# Altium PCB H21R4.PcbDoc
Units mil, origin at the board's own origin, x right, y up, seen from the top; angles counter-clockwise.
Board outline 1363.78 x 1181.1 mil, 2 copper layers (Top Layer, Bottom Layer); 61 components, 50 nets, 209 pads, 10 vias.
Unrouted connection lines stored in the file: 51.
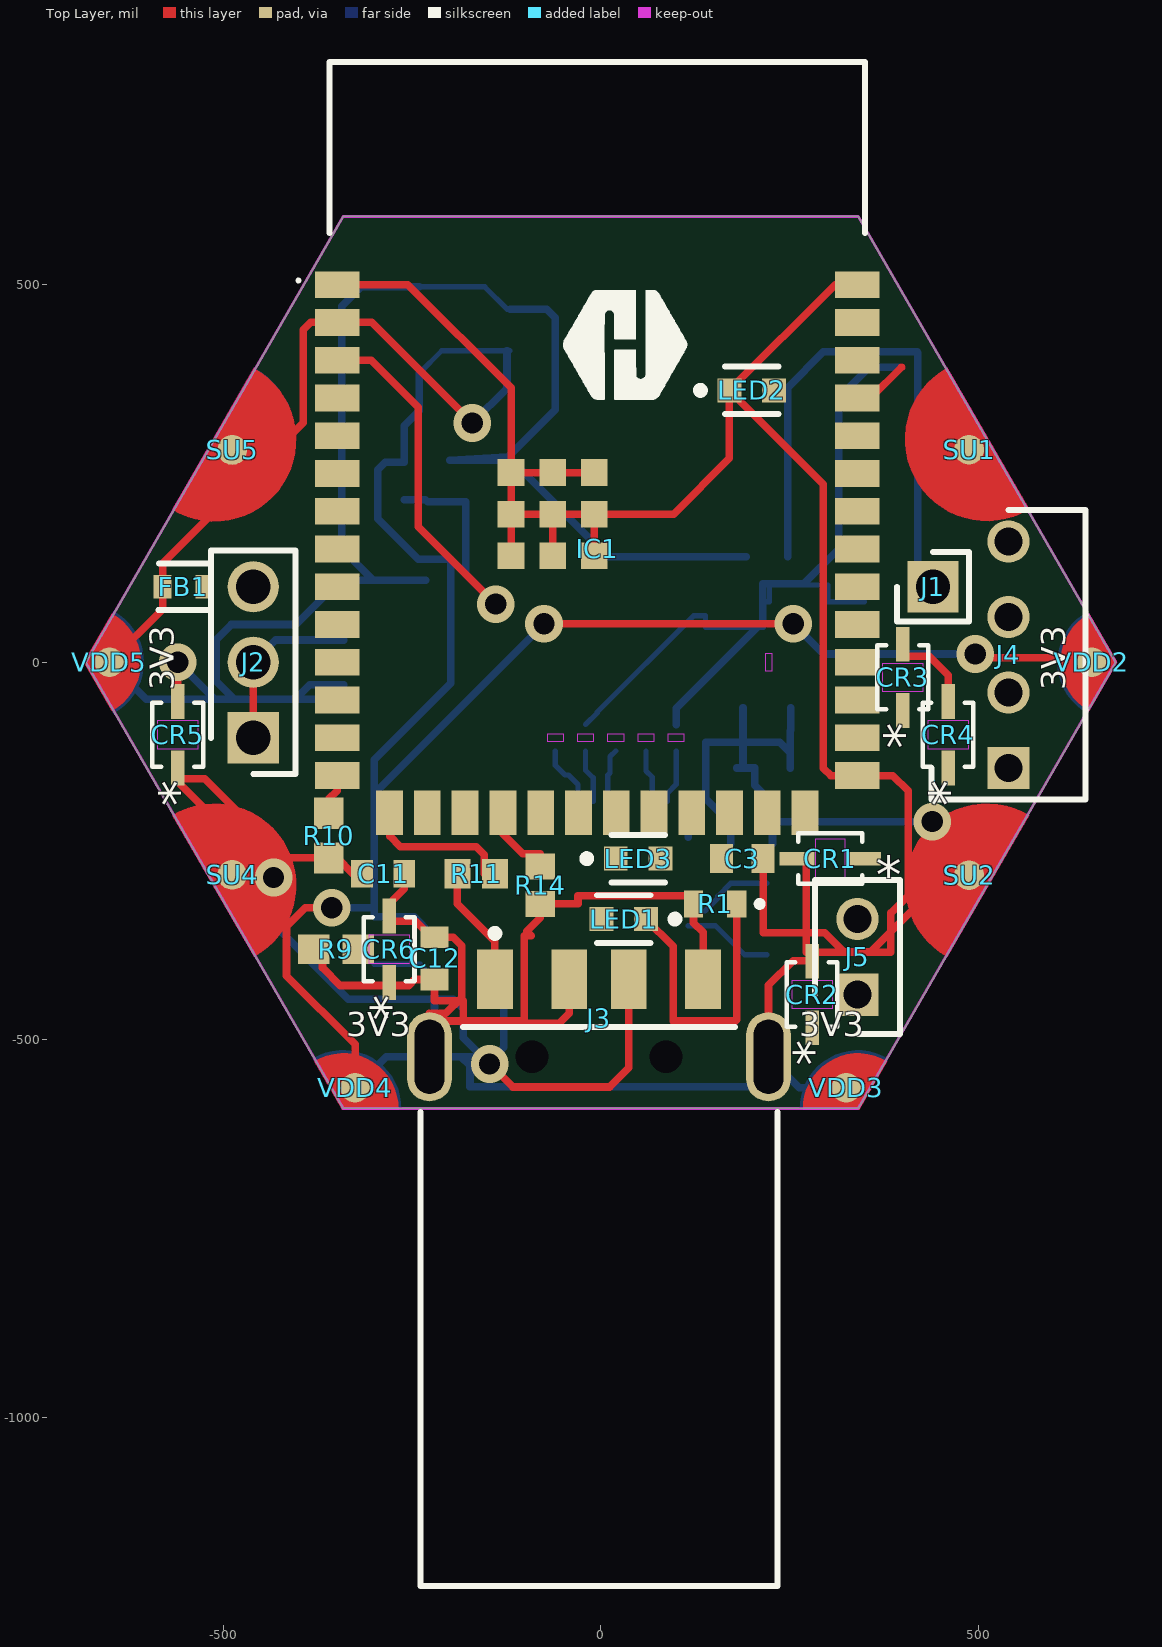
[diagram p0: Top Layer view]
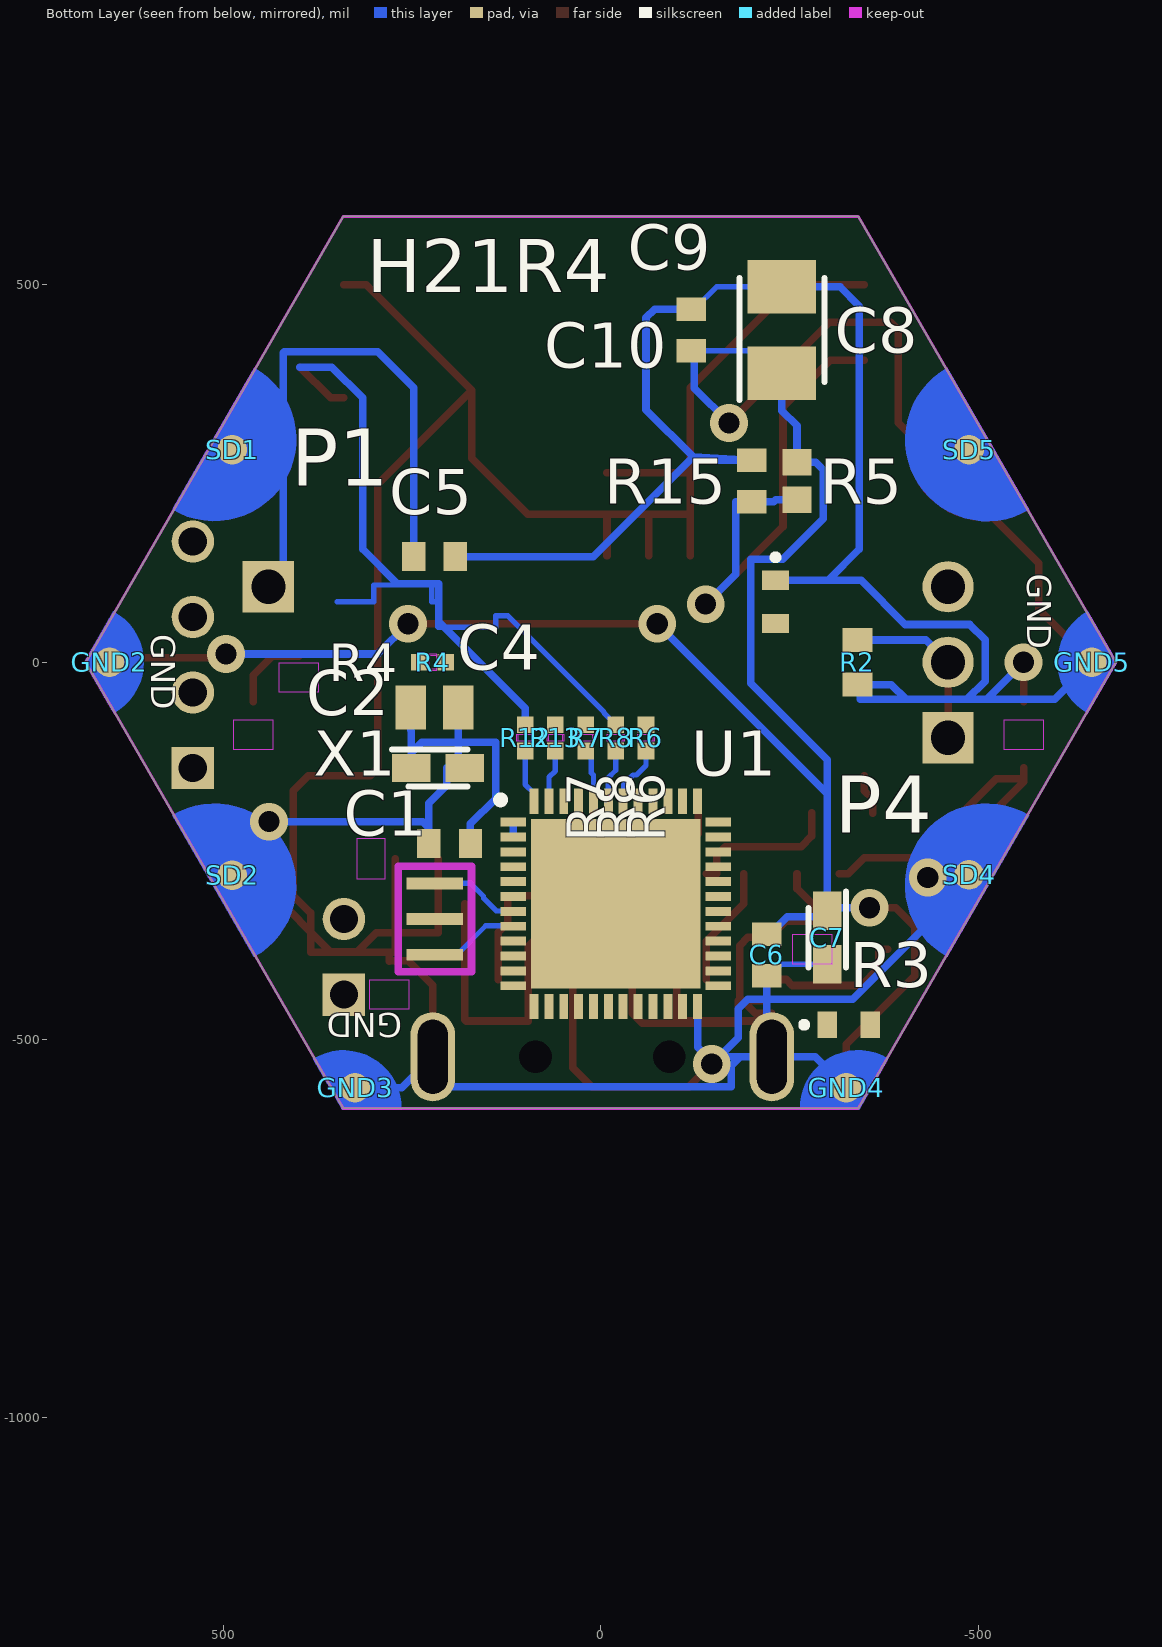
[diagram p1: Bottom Layer view, seen from below]

## Layer stack, top to bottom
Top Solder: solder mask 0.4, Solder Resist, Dk 3.5
Top Layer: signal copper 1.4
Dielectric 1: dielectric 12.6, FR-4, Dk 4.8
Bottom Layer: signal copper 1.4
Bottom Solder: solder mask 0.4, Solder Resist, Dk 3.5

## Board outline
-340.94,-590.55 340.94,-590.55 681.89,0 340.94,590.55 -340.94,590.55 -681.89,0

## Design rules (kind name [scope] priority, off if disabled: settings)
Clearance [All] p1: gap=10 ignorepadtopadclearanceinfootprint=FALSE
PolygonConnect [All] p1: connectstyle=Relief reliefconductorwidth=10 reliefentries=4 polygonreliefangle="90 Angle" airgapwidth=10
RoutingVias [All] p1: holewidth=28 width=50 viastyle="Through Hole" minholewidth=28 minwidth=50 maxholewidth=28 maxwidth=50
SolderMaskExpansion [All] p1: expansion=4 istentingtop=FALSE
SupplyNets "Schematic Supply Nets_3" [InNet('GND')] p1: voltage=0.000
SupplyNets "Schematic Supply Nets_2" [InNet('VDDA')] p2: voltage=0.000
SupplyNets "Schematic Supply Nets_1" [InNet('VSSA')] p3: voltage=0.000
SupplyNets "Schematic Supply Nets" [InNet('VDD')] p4: voltage=0.000
Width [All] p1: maxlimit=10 minlimit=7 preferedwidth=10
30 further rules are at their usual default settings.

## Classes and differential pairs
component class H21R4_Frontend: C8 C9 C10 C11 C12 CR1 CR2 CR3 CR4 CR5 CR6 D+ D- IC1 J3 J4 J5 LED3 R5 R6 R7 R8 R9 R10 R11 R12 R13 R14 R15 RX0 TCK TDI TDO TMS TX0
component class H21R4_Backend: C1 C2 C3 C4 C5 C6 C7 D? FB1 GND2 GND3 GND4 GND5 J1 J2 LED1 LED2 R1 R2 R3 R4 SD1 SD2 SD4 SD5 SU1 SU2 SU4 SU5 U1 VDD2 VDD3 VDD4 VDD5 X1

## Components (designator, comment, footprint, x,y, rotation, side; value= is the part's Value field where it differs from the comment)
C1 "C0603C104K8RAC7867" CAPC1608X87N 200,-240 r180 bottom value=100nF
C2 "10TPU4R7MSI" CAPPM2012X100N 215.43,-140 r180 bottom value=4.7µF
C3 "C0603C104K8RAC7867" CAPC1608X87N 187.56,-260 r180 top value=100nF
C4 "CC0805KKX7R7BB105" CAPC2012X145N 220,-60 r180 bottom value=1µF
C5 "C0603C104K8RAC7867" CAPC1608X87N 220,140 r180 bottom value=0.1µF
C6 "C0603C104K8RAC7867" CAPC1608X87N -220,-387.56 r90 bottom value=100nF
C7 "10TPU4R7MSI" CAPPM2012X100N -300,-364.57 r270 bottom value=4.7µF
C8 "TPSB106K016R0500" CAPPM3528X210N -240,440 r90 bottom value=10µF
C9 "C0603C104K8RAC7867" CAPC1608X87N -120,440 r90 bottom value=0.1µF
C10 "C0603C104K8RAC7867" CAPC1608X87N -200,240 r90 bottom value=0.1µF
C11 "CL10C470JB8NNNC" CAPC1608X90N -287.95,-280 r0 top value=47pF
C12 "CL10C470JB8NNNC" CAPC1608X90N -220,-392.05 r90 top value=47pF
CR1 "CDSOD323-T03SC" SOD-323_BRN 304,-260 r180 top
CR2 "CDSOD323-T03SC" SOD-323_BRN 280,-440 r90 top
CR3 "CDSOD323-T03SC" SOD-323_BRN 400,-20 r90 top
CR4 "CDSOD323-T03SC" SOD-323_BRN 460,-96 r90 top
CR5 "CDSOD323-T03SC" SOD-323_BRN -560,-96 r90 top
CR6 "CDSOD323-T03SC" SOD-323_BRN -280,-380 r90 top
FB1 "MMZ1608Y300B" FP-MMZ1608-0_8-MFG -552.44,100 r0 top
GND2 "HEXABIT_UART_PORT" HEXABIT_POWER_PORT_D 650.39,0 r300 top
GND3 "HEXABIT_UART_PORT" HEXABIT_POWER_PORT_D 325.2,-563.39 r240 top
GND4 "HEXABIT_UART_PORT" HEXABIT_POWER_PORT_D -325.2,-563.39 r180 top
GND5 "HEXABIT_UART_PORT" HEXABIT_POWER_PORT_D -650.39,0 r120 top
IC1 "ESP32-S3-WROOM-1-N8" ESP32S3WROOM1N8R2 -4.49,292.91 r0 top
J1 "5-146280-1" HDRV1W67P0X254_1X1_213X234X821P 440,100 r0 top
J2 "5-146281-3" HDRV3W96P0X254_1X3_721X234X869P -460,-100 r90 top
J3 "480-37-1000" MOLX-480-37-1000_V -2.2,-471.18 r0 top
J4 "5-146280-4" HDRV4W77P254_4X1_467X488X821P 540,-140 r0 top
J5 "5-146280-2" HDRV2W77P0X254_1X2_467X234X872P 340,-440 r90 top
LED1 "VLMS1300-GS08" FP-6_541-5092_01-4-MFG 30.47,-340 r180 top
LED2 "VLMS1300-GS08" FP-6_541-5092_01-4-MFG 200,360 r0 top
LED3 "VLMS1300-GS08" FP-6_541-5092_01-4-MFG 49.53,-260 r0 top
R1 "ERJ-3GEYJ271V" ERJ3EKF1000V 151.46,-320 r180 top value=270Ω
R2 "Resistor 10k +/-1% 0603 100 mW" RESC1608X55X25ML10T15 -340,0 r270 bottom value=10kΩ
R3 "ERJ-3GEYJ271V" ERJ3EKF1000V -328.54,-480 r180 bottom value=270Ω
R4 "AC0402JR-070RL" YAG_AC0402_YAG 222.5,0 r180 bottom value=0R
R5 "RMCF0603JT10K0" CAPC1508X06N -260,240 r270 bottom value=10k
R6 "AC0402JR-070RL" YAG_AC0402_YAG -60,-100 r90 bottom value=0R
R7 "AC0402JR-070RL" YAG_AC0402_YAG 20,-100 r90 bottom value=0R
R8 "AC0402JR-070RL" YAG_AC0402_YAG -20,-100 r90 bottom value=0R
R9 "ERJ-3GEYJ270V" CAPC1608X06N -350.47,-380 r0 top value=27R
R10 "ERJ-3GEYJ270V" CAPC1608X06N -360,-229.53 r90 top value=27R
R11 "RMCF0603JT10K0" CAPC1508X06N -164.8,-280 r0 top value=10k
R12 "AC0402JR-070RL" YAG_AC0402_YAG 100,-100 r270 bottom value=0R
R13 "AC0402JR-070RL" YAG_AC0402_YAG 60,-100 r270 bottom value=0R
R14 "RMCF0603JT10K0" CAPC1508X06N -80,-295.2 r90 top value=10k
R15 "ERJ-3GEYJ271V" ERJ3EKF1000V -231.46,80 r270 bottom value=270Ω
SD1 "HEXABIT_UART_PORT" HEXABIT_UART_PORT_D 487.8,281.5 r0 top
SD2 "HEXABIT_UART_PORT" HEXABIT_UART_PORT_D 487.8,-281.89 r300 top
SD4 "HEXABIT_UART_PORT" HEXABIT_UART_PORT_D -487.8,-281.5 r180 top
SD5 "HEXABIT_UART_PORT" HEXABIT_UART_PORT_D -487.8,281.5 r120 top
SU1 "HEXABIT_UART_PORT" HEXABIT_UART_PORT_U 487.8,281.5 r0 top
SU2 "HEXABIT_UART_PORT" HEXABIT_UART_PORT_U 487.8,-281.89 r300 top
SU4 "HEXABIT_UART_PORT" HEXABIT_UART_PORT_U -487.8,-281.5 r180 top
SU5 "HEXABIT_UART_PORT" HEXABIT_UART_PORT_U -487.8,281.11 r120 top
U1 "STM32G0B1CEU6" QFN50P700X700X65-49N-D -20,-320 r180 bottom
VDD2 "HEXABIT_UART_PORT" HEXABIT_POWER_PORT_U 650.39,0 r0 top
VDD3 "HEXABIT_UART_PORT" HEXABIT_POWER_PORT_U 325.2,-563.39 r300 top
VDD4 "HEXABIT_UART_PORT" HEXABIT_POWER_PORT_U -325.2,-563.39 r240 top
VDD5 "HEXABIT_UART_PORT" HEXABIT_POWER_PORT_U -650.39,0 r180 top
X1 "CSTCE8M00G52Z-R0" XTALL_CSTCE8M00G52 220,-340 r180 bottom value=10pF

## Footprints (in the part's own frame and the unit in brackets; to place one, negate y for a bottom-side part, rotate by r counter-clockwise, add the part's x,y. Pads: shape width x height; smd on the part's side, far side on the other; paste and mask are expansions set on the pad)
CAPC1508X06N [mm] "Chip Capacitor, 2-Leads, Body 1.55x0.80mm, IPC Medium Density"
  rect 0.88x0.98 smd: 1(-0.63,0) 2(0.63,0)
  body extent -0.85,-0.48 0.85,0.47, height 0.6
CAPC1608X06N [mm] "Chip Capacitor, 2-Leads, Body 1.60x0.80mm, IPC Medium Density"
  rect 1.05x1 smd: 1(-0.75,0) 2(0.75,0)
  body extent -0.88,-0.48 0.87,0.47, height 0.55
CAPC1608X87N [mm]
  rect 0.78x0.98 smd: 1(-0.7,0) 2(0.7,0)
CAPC1608X90N [mm]
  rect 0.73x0.94 smd: 1(-0.71,0) 2(0.71,0)
  body extent -0.8,-0.4 0.8,0.4, height 0.9
CAPC2012X145N [mm]
  rect 1.02x1.47 smd: 1(-0.8,0) 2(0.8,0)
CAPPM2012X100N [mm]
  rect 1.3x0.95 smd: 1(-0.9,0) 2(0.9,0)
  silkscreen extent -1.55,-0.63 1,0.62
CAPPM3528X210N [mm]
  rect 1.8x2.3 smd: 1(-1.45,0) 2(1.45,0)
  silkscreen extent -2.35,-1.43 1.75,1.43, body extent -1.75,-1.43 1.75,1.43, height 2.1
ERJ3EKF1000V [mm]
  rect 0.65x0.9 smd: 1(-0.725,0) 2(0.725,0)
  silkscreen extent -1.6,-0.1 -1.4,0.1, body extent -0.8,-0.4 0.8,0.4, height 0.45
ESP32S3WROOM1N8R2 [mm]
  rect 1.5x0.9 smd: 1(-8.75,5.26) 2(-8.75,3.99) 3(-8.75,2.72) 4(-8.75,1.45) 5(-8.75,0.18) 6(-8.75,-1.09) 7(-8.75,-2.36) 8(-8.75,-3.63) 9(-8.75,-4.9) 10(-8.75,-6.17) 11(-8.75,-7.44) 12(-8.75,-8.71) 13(-8.75,-9.98) 14(-8.75,-11.25) 27(8.75,-11.25) 28(8.75,-9.98) 29(8.75,-8.71) 30(8.75,-7.44) 31(8.75,-6.17) 32(8.75,-4.9) 33(8.75,-3.63) 34(8.75,-2.36) 35(8.75,-1.09) 36(8.75,0.18) 37(8.75,1.45) 38(8.75,2.72) 39(8.75,3.99) 40(8.75,5.26)
  rect 0.9x1.5 smd: 15(-6.985,-12.5) 16(-5.715,-12.5) 17(-4.445,-12.5) 18(-3.175,-12.5) 19(-1.905,-12.5) 20(-0.635,-12.5) 21(0.635,-12.5) 22(1.905,-12.5) 23(3.175,-12.5) 24(4.445,-12.5) 25(5.715,-12.5) 26(6.985,-12.5)
  rect 0.9x0.9 smd: 41(-1.5,-2.46) 42(-1.5,-1.06) 43(-2.9,-1.06) 44(-2.9,-2.46) 45(-2.9,-3.86) 46(-1.5,-3.86) 47(-0.1,-3.86) 48(-0.1,-2.46) 49(-0.1,-1.06)
  silkscreen extent -10.1,5.35 9,12.75, body extent -9,-12.75 9,12.75, height 2.7
FP-6_541-5092_01-4-MFG [mm]
  rect 0.8x0.8 smd paste+0 mask+0: 1(-0.75,0) 2(0.75,0)
  silkscreen extent -1.85,-0.8 0.9,0.8, body extent -1.25,-0.6 1.25,0.6, height 0.25
FP-MMZ1608-0_8-MFG [mm]
  rect 0.6x0.8 smd paste+0 mask+0: 1(-0.7,0) 2(0.7,0)
  silkscreen extent -0.85,-0.79 0.92,0.77, body extent -1.1,-0.58 1.1,0.58, height 0.25
HDRV1W67P0X254_1X1_213X234X821P [mm]
  rect 1.725x1.725 hole 1.15: 1(0,0)
  silkscreen extent -1.21,-1.17 1.21,1.17, body extent -1.07,-1.17 1.07,1.17, height 8.12
HDRV2W77P0X254_1X2_467X234X872P [mm]
  rect 1.425x1.425 / inner round 1.425 / far side rect 1.425x1.425 hole 0.95: 1(0,0)
  round 1.425 hole 0.95: 2(2.54,0)
  silkscreen extent -1.32,-1.43 3.86,1.43
HDRV3W96P0X254_1X3_721X234X869P [mm]
  rect 1.725x1.725 hole 1.15: 1(0,0)
  round 1.725 hole 1.15: 2(2.54,0) 3(5.08,0)
  silkscreen extent -1.21,-1.43 6.29,1.43, body extent -1.07,-1.17 6.15,1.17, height 8.12
HDRV4W77P254_4X1_467X488X821P [mm]
  rect 1.425x1.425 / inner round 1.425 / far side rect 1.425x1.425 hole 0.95: 1(0,0)
  round 1.425 hole 0.95: 2(0,2.54) 3(0,5.08) 4(0,7.62)
  silkscreen extent -2.59,-1.06 2.59,8.68
HEXABIT_POWER_PORT_D [mm]
  rrect100% 1x1 smd far side paste+0: Pwr_D(0,0)
  Bottom Layer region: 1.418,-0.978 0.633,-1.25 -0.194,-1.171 -0.914,-0.754 -1.394,-0.076 -1.549,0.74 -1.549,0.74 0.429,0.74
HEXABIT_POWER_PORT_U [mm]
  rrect100% 1x1 smd paste+0: Pwr_U(0,0)
  Top Layer region: -0.081,-1.631 -0.68,-1.115 -1.01,-0.395 -1.01,0.395 -0.68,1.115 -0.081,1.631 -0.081,1.631 0.858,0
HEXABIT_UART_PORT_D [mm]
  rrect100% 1x1 smd far side paste+0: UART_D(0,0)
  Bottom Layer region: 2.018,-2.008 0.84,-2.391 -0.386,-2.219 -1.413,-1.526 -2.032,-0.453 -2.117,0.782 -1.653,1.93 -0.731,2.758 -0.731,2.758
HEXABIT_UART_PORT_U [mm]
  rrect100% 1x1 smd paste+0: UART_U(0,0)
  Top Layer region: 2.018,-2.008 0.84,-2.391 -0.386,-2.219 -1.413,-1.526 -2.032,-0.453 -2.117,0.782 -1.653,1.93 -0.731,2.758 -0.731,2.758
MOLX-480-37-1000_V [mm] "CONN, 4-Leads, Body 12x18.8mm"
  rect 1.2x2 smd: 1(-3.5,1.3) 2(-1,1.3) 3(1,1.3) 4(3.5,1.3)
  oval 1.5x3 hole 1 slot 2.5 at 90 deg: 5(-5.7,-1.3) 6(5.7,-1.3)
  round 0.5 hole 1.1 unplated: MH1(-2.25,-1.3) MH2(2.25,-1.3)
  silkscreen extent -6,-19.1 6,2.97, body extent -6.35,-19.08 6.35,2.2, height 3.07
QFN50P700X700X65-49N-D [mm]
  rect 0.85x0.3 smd mask+0: 1(-3.45,2.75) 2(-3.45,2.25) 3(-3.45,1.75) 4(-3.45,1.25) 5(-3.45,0.75) 6(-3.45,0.25) 7(-3.45,-0.25) 8(-3.45,-0.75) 9(-3.45,-1.25) 10(-3.45,-1.75) 11(-3.45,-2.25) 12(-3.45,-2.75) 25(3.45,-2.75) 26(3.45,-2.25) 27(3.45,-1.75) 28(3.45,-1.25) 29(3.45,-0.75) 30(3.45,-0.25) 31(3.45,0.25) 32(3.45,0.75) 33(3.45,1.25) 34(3.45,1.75) 35(3.45,2.25) 36(3.45,2.75)
  rect 0.3x0.85 smd mask+0: 13(-2.75,-3.45) 14(-2.25,-3.45) 15(-1.75,-3.45) 16(-1.25,-3.45) 17(-0.75,-3.45) 18(-0.25,-3.45) 19(0.25,-3.45) 20(0.75,-3.45) 21(1.25,-3.45) 22(1.75,-3.45) 23(2.25,-3.45) 24(2.75,-3.45) 37(2.75,3.45) 38(2.25,3.45) 39(1.75,3.45) 40(1.25,3.45) 41(0.75,3.45) 42(0.25,3.45) 43(-0.25,3.45) 44(-0.75,3.45) 45(-1.25,3.45) 46(-1.75,3.45) 47(-2.25,3.45) 48(-2.75,3.45)
  rect 5.7x5.7 smd mask+0: 49(0,0)
  silkscreen extent -4,3.38 -3.75,3.62, body extent -3.56,-3.56 3.56,3.56, height 0.61
RESC1608X55X25ML10T15 [mm] "Chip Resistor, 2-Leads, Body 1.70x0.90mm, IPC Low Density"
  rect 0.8x1 smd: 1(-0.75,0) 2(0.75,0)
  body extent -0.85,-0.45 0.85,0.45, height 0.55
SOD-323_BRN [mil]
  rect 46x18 smd paste+0 mask+0: 1(-44,0) 2(44,0)
  Keep-Out Layer region: -19,-26.5 -19,26.5 19,26.5 19,-26.5
  silkscreen extent -43,-33 42,34, body extent -53,-29 53,29, height 45
XTALL_CSTCE8M00G52 [mm]
  rect 1.9x0.4 smd: P$1(0,1.2) P$2(0,0) P$3(0,-1.2)
  Top Layer keep-out lines w0.254: 1.245,-1.778 1.245,1.778 -1.219,1.778 -1.219,-1.778 1.245,-1.778
  body extent -0.67,-1.6 0.64,1.6, height 0.8
YAG_AC0402_YAG [mil]
  rect 22x22 smd paste+0 mask+0: 1(-17.5,0) 2(17.5,0)
  Top Layer keep-out region: -4.5,-9 -4.5,9 4.5,9 4.5,-9
  Keep-Out Layer region: -4.5,-11 -4.5,11 4.5,11 4.5,-11
  body extent -21,-11 21,11, height 15

## Part data
C1 C3 C6: library part CMP-001-00141-1, "Multilayer Ceramic Capacitors MLCC - SMD/SMT .1UF     10V   10%        0603", Manufacturer_Name=KEMET, Mouser Part Number=N/A, Arrow Part Number=C0603C104K8RAC7867, Arrow Price/Stock=https://www.arrow.com/en/products/c0603c104k8rac7867/kemet-corporation?region=nac, Datasheet Link=https://labcenter.componentsearchengine.com/Datasheets/1/C0603C104K8RAC7867.pdf, Design Item ID=C0603C104K8RAC7867, Geometry.Height=0.87mm, Manufacturer_Part_Number=C0603C104K8RAC7867, Mouser Price/Stock=https://www.mouser.co.uk/ProductDetail/KEMET/C0603C104K8RAC7867?qs=DLNzJaHuXGcLxwK2qWBfDA%3D%3D, Source=C0603C104K8RAC7867.SchLib
C2 C7: library part CMP-001-00143-1, "Capacitor Tantalum TPU series 10V 4.7uF Panasonic 4.7uF 10 V dc Tantalum Capacitor Polymer Solid +/-20% tolerance POSCAP series", Manufacturer_Name=Panasonic, Mouser Part Number=667-10TPU4R7MSI, Arrow Part Number=10TPU4R7MSI, Arrow Price/Stock=https://www.arrow.com/en/products/10tpu4r7msi/panasonic, Datasheet Link=https://industrial.panasonic.com/cdbs/www-data/pdf/AAA8000/AAA8000C28.pdf, Design Item ID=10TPU4R7MSI, Geometry.Height=1mm, Manufacturer_Part_Number=10TPU4R7MSI, Mouser Price/Stock=https://www.mouser.com/Search/Refine.aspx?Keyword=667-10TPU4R7MSI, Source=10TPU4R7MSI.SchLib
C4: library part CMP-001-00144-1, "YAGEO - CC0805KKX7R7BB105 - SMD Multilayer Ceramic Capacitor, 1 F, 16 V, 0805 [2012 Metric], +/- 10%, X7R, CC Series", Manufacturer_Name=YAGEO, Mouser Part Number=603-CC805KKX7R7BB105, Arrow Part Number=CC0805KKX7R7BB105, Arrow Price/Stock=https://www.arrow.com/en/products/cc0805kkx7r7bb105/yageo?region=nac, Datasheet Link=https://4donline.ihs.com/images/VipMasterIC/IC/YAGO/YAGO-S-A0003557223/YAGO-S-A0003557223-1.pdf?hkey=6D3A4C79FDBF58556ACFDE234799DDF0, Design Item ID=CC0805KKX7R7BB105, Geometry.Height=1.45mm, Manufacturer_Part_Number=CC0805KKX7R7BB105, Mouser Price/Stock=https://www.mouser.co.uk/ProductDetail/YAGEO/CC0805KKX7R7BB105?qs=AgBp2OyFlx%2FM8WCHgVQGuw%3D%3D, Source=CC0805KKX7R7BB105.SchLib
C5 C9 C10: "Capacitor", Manufacturer_Name=KEMET, Mouser Part Number=N/A, Arrow Part Number=C0603C104K8RAC7867, Arrow Price/Stock=https://www.arrow.com/en/products/c0603c104k8rac7867/kemet-corporation?region=nac, Datasheet Link=https://labcenter.componentsearchengine.com/Datasheets/1/C0603C104K8RAC7867.pdf, Height=0.87mm, Manufacturer_Part_Number=C0603C104K8RAC7867, Mouser Price/Stock=https://www.mouser.co.uk/ProductDetail/KEMET/C0603C104K8RAC7867?qs=DLNzJaHuXGcLxwK2qWBfDA%3D%3D
C8: "Capacitor Polarised", Manufacturer_Name="Kyocera AVX", Mouser Part Number=581-TPSB106K016R0500, Arrow Part Number=TPSB106K016R0500, Arrow Price/Stock=https://www.arrow.com/en/products/tpsb106k016r0500/avx?utm_currency=USD&region=nac, Datasheet Link=https://componentsearchengine.com/Datasheets/2/TPSB106K016R0500.pdf, Height=2.1mm, Manufacturer_Part_Number=TPSB106K016R0500, Mouser Price/Stock=https://www.mouser.co.uk/ProductDetail/KYOCERA-AVX/TPSB106K016R0500?qs=2Zc1E7vIw%252B6V4Ir4qQ11Ew%3D%3D
C11 C12: "Capacitor", Manufacturer_Name=SAMSUNG, Mouser Part Number=187-CL10C470JB8NNNC, Arrow Part Number=CL10C470JB8NNNC, Arrow Price/Stock=https://www.arrow.com/en/products/cl10c470jb8nnnc/samsung-electro-mechanics?region=nac, Datasheet Link=http://uk.rs-online.com/web/p/products/7665095, Height=0.9mm, Manufacturer_Part_Number=CL10C470JB8NNNC, Mouser Price/Stock=https://www.mouser.co.uk/ProductDetail/Samsung-Electro-Mechanics/CL10C470JB8NNNC?qs=349EhDEZ59pmluRkjzIjBw%3D%3D
CR1 CR2 CR3 CR4 CR5 CR6: library part CMP-009-000000-1, "Description", Manufacturer_Name="Bourns Electronics", Copyright="Copyright (C) 2025 Ultra Librarian. All rights reserved.", Design Item ID=CDSOD323-T03SC, Manufacturer_Part_Number=CDSOD323-T03SC, Source=CDSOD323-T03SC.SchLib
FB1: library part CMP-006-00027-1, "Ferrite Beads 0603 30ohms 1500mA Signal Line AEC-Q200", Case Code (Metric)=1608, Case/Package=0603, Current Rating=1.5A, DC Resistance (DCR)=50mO, Manufacturer=TDK, Manufacturer Lifecycle Status=PRODUCTION, Manufacturer Part Number=MMZ1608Y300BTD25, Max Operating Temperature=125°C, Min Operating Temperature=-55°C, Ratings=AEC-Q200, Test Frequency=100MHz, Tolerance=25%, Category="Ferrite Beads and Chips", Component Type=Standard, ComponentLink1Description=https://datasheet.octopart.com:443/MMZ1608Y300BTD25-TDK-datasheet-181268448.pdf?src-supplier=IHS, ComponentLink1URL=https://datasheet.octopart.com:443/MMZ1608Y300BTD25-TDK-datasheet-181268448.pdf?src-supplier=IHS, ComponentLink2Description=https://datasheet.octopart.com:443/MMZ1608Y300BTD25-TDK-datasheet-151367874.pdf?src-supplier=TDK, ComponentLink2URL=https://datasheet.octopart.com:443/MMZ1608Y300BTD25-TDK-datasheet-151367874.pdf?src-supplier=TDK, Core Material=Ferrite, Design Item ID=MMZ1608Y300B, ESR=50m, Height=800µm, Impedance=30O, Length=1.6mm, Library=Hexabitz, Lifecycle Status=Production, Max Current Rating=1.5A, Max DC Current=1.5A, Max Length=1.75mm, Max Width=950µm, Min Length=1.45mm, Min Width=650µm, Mounting Technology="Surface Mount", Number of Circuits=1, Number of Lines=1, Number of Terminals=2, Packaging="Tape & Reel (TR)", Pins=2, Pricing="1=0.1, 10=0.06, 25=0.052, 50=0.0468, 100=0.0419, 250=0.03612, 500=0.03214, 1000=0.02847 (USD)", REACH SVHC=Yes, RMS Current (Irms)=1.5A, RoHS=Compliant, Source=Passive.SchLib, Stock=11896, Termination=SMD/SMT, Weight=2.012816mg, Width=800µm
GND2 GND3 GND4 GND5: library part HEXABIT_POWER_PORT_D
IC1: "SMD MODULE, ESP32-S3, 8 MB SPI F", Manufacturer_Name="Espressif Systems", Mouser Part Number=356-ESP32-S3WROOM1N8, Datasheet Link=https://www.espressif.com/sites/default/files/documentation/esp32-s3-wroom-1_wroom-1u_datasheet_en.pdf, Height=3.25mm, Manufacturer_Part_Number=ESP32-S3-WROOM-1-N8, Mouser Price/Stock=https://www.mouser.co.uk/ProductDetail/Espressif-Systems/ESP32-S3-WROOM-1-N8?qs=Wj%2FVkw3K%252BMC1mq0KGPvoSQ%3D%3D
J1: library part CMP-014-00004-1, "AMP - TE CONNECTIVITY - 5-146280-1 - 01 MODII HDR SRST B/A LF", Manufacturer_Name="TE Connectivity", Mouser Part Number=571-51462801, Arrow Part Number=5-146280-1, Arrow Price/Stock=https://www.arrow.com/en/products/5-146280-1/te-connectivity?region=nac, Datasheet Link=https://www.te.com/commerce/DocumentDelivery/DDEController?Action=showdoc&DocId=Customer+Drawing%7F146280%7FH2%7Fpdf%7FEnglish%7FENG_CD_146280_H2.pdf%7F5-146280-1, Design Item ID=5-146280-1, Geometry.Height=8.21mm, Manufacturer_Part_Number=5-146280-1, Mouser Price/Stock=https://www.mouser.co.uk/ProductDetail/TE-Connectivity/5-146280-1?qs=bwpFY26eRVcArW7BMMLddw%3D%3D, Source=5-146280-1.SchLib
J2: "Connector", Manufacturer_Name="TE Connectivity", Mouser Part Number=571-5-146281-3, Arrow Part Number=5-146281-3, Arrow Price/Stock=https://www.arrow.com/en/products/5-146281-3/te-connectivity?region=nac, Datasheet Link=http://www.te.com/commerce/DocumentDelivery/DDEController?Action=showdoc&DocId=Customer+Drawing%7F146281%7FG2%7Fpdf%7FEnglish%7FENG_CD_146281_G2.pdf%7F5-146281-3, Height=8.69mm, Manufacturer_Part_Number=5-146281-3, Mouser Price/Stock=https://www.mouser.co.uk/ProductDetail/TE-Connectivity/5-146281-3?qs=bwpFY26eRVc0RlLXOkMSNw%3D%3D
J3: library part CMP-002-00040-2, "Universal Serial Bus (USB) Shielded I/O Plug, Type A, Right Angle Connector, 4 Position, Height 4.6 mm, -20 to 85 degC, RoHS, Tray", Colour=Black, Current Rating=1.5A, Manufacturer=Molex, Max Operating Temperature=85°C, Max Voltage Rating (AC)=150V, Min Operating Temperature=-20°C, Package Description="4-Pin Surface Mount Device, Body 12 x 18.8 mm", Case/Package=480-37-1000, Connector Type=USB, Contact Material=Brass, Contact Plating=Gold, Datasheet URL=http://www.molex.com/pdm_docs/sd/480371000_sd.pdf, Datasheet Version="Rev. D, 06/2004", Gender=Male, Manufacturer URL=http://www.molex.com/, Max Current Rating=1.5A, Mounting Technology=SM, Package Reference=480-37-1000, Packaging=Tray, Pins=4, RoHS Compliant=True, Voltage Rating (AC)=150V
J4: library part CMP-002-00113-1, "TE Connectivity Mod II Series, 2.54mm Pitch 4 Way 1 Row Straight PCB Header, Through Hole Termination", Manufacturer_Name="TE Connectivity", Datasheet Link=https://datasheet.datasheetarchive.com/originals/distributors/DKDS-20/396066.pdf, Design Item ID=5-146280-4, Geometry.Height=8.21mm, Manufacturer_Part_Number=5-146280-4, Source=5-146280-4.SchLib
J5: library part CMP-057-000000-1, "Body Features: Primary Product Color Black", Manufacturer_Name="TE Connectivity", Mouser Part Number=571-5-146280-2, Arrow Part Number=5-146280-2, Arrow Price/Stock=https://www.arrow.com/en/products/5-146280-2/te-connectivity?utm_currency=USD&region=europe, Datasheet Link=http://www.te.com/commerce/DocumentDelivery/DDEController?Action=showdoc&DocId=Customer+Drawing%7F146280%7FH2%7Fpdf%7FEnglish%7FENG_CD_146280_H2.pdf%7F5-146280-2, Design Item ID=5-146280-2, Geometry.Height=8.72mm, Manufacturer_Part_Number=5-146280-2, Mouser Price/Stock=https://www.mouser.co.uk/ProductDetail/TE-Connectivity/5-146280-2?qs=bwpFY26eRVcxHP%252BQexhLNQ%3D%3D, Source=5-146280-2.SchLib
LED1 LED2 LED3: library part CMP-007-00039-1, "LED Uni-Color Super Red 639nm 2-Pin Chip 0603(1608Metric) T/R", Case Code (Metric)=1608, Case/Package=0603, Color=Red, Forward Current=20mA, Forward Voltage=2V, Manufacturer="Vishay Semiconductors", Max Operating Temperature=85°C, Min Operating Temperature=-35°C, Package Quantity=1, Power Rating=75mW, Category=LEDs, Component Type=Standard, ComponentLink1Description=https://datasheet.ciiva.com/26322/vlmo1300-26322153.pdf?src-supplier=Element14, ComponentLink1URL=https://datasheet.ciiva.com/26322/vlmo1300-26322153.pdf?src-supplier=Element14, ComponentLink2Description=https://datasheet.ciiva.com/8028/vlmo1300-8028047.pdf?src-supplier=Element14, ComponentLink2URL=https://datasheet.ciiva.com/8028/vlmo1300-8028047.pdf?src-supplier=Element14, ComponentLink3Description=https://datasheet.ciiva.com/9333/vlmo1300-9333743.pdf?src-supplier=Avnet, ComponentLink3URL=https://datasheet.ciiva.com/9333/vlmo1300-9333743.pdf?src-supplier=Avnet, ComponentLink4Description=https://datasheet.ciiva.com/16510/vlmo1300-16510985.pdf?src-supplier=Future+Electronics, ComponentLink4URL=https://datasheet.ciiva.com/16510/vlmo1300-16510985.pdf?src-supplier=Future+Electronics, ComponentLink5Description=https://datasheet.ciiva.com/2114/vlmo1300-2114930.pdf?src-supplier=Digikey, ComponentLink5URL=https://datasheet.ciiva.com/2114/vlmo1300-2114930.pdf?src-supplier=Digikey, ComponentLink6Description=https://datasheet.ciiva.com/2114/vlmo1300-2114931.pdf?src-supplier=Digikey, ComponentLink6URL=https://datasheet.ciiva.com/2114/vlmo1300-2114931.pdf?src-supplier=Digikey, ComponentLink7Description=https://datasheet.ciiva.com/2114/vlmo1300-2114929.pdf?src-supplier=Digikey, ComponentLink7URL=https://datasheet.ciiva.com/2114/vlmo1300-2114929.pdf?src-supplier=Digikey, Design Item ID=VLMS1300-GS08, Dominant Wavelength=631nm, Height=0.8mm, Illumination Color=Red, Lead Free="Lead Free", Length=1.6mm, Lens Style=Rectangular,Clear, Library=Hexabitz, Luminous Intensity=54mcd, Manufacturer Part Number=VLMS1300-GS08, Mounting Technology="Surface Mount", Number of LEDs=1, Packaging="Tape and Reel", Pins=2, Pricing="1=0.21, 10=0.143, 100=0.0998, 500=0.07982, 1000=0.07322 (USD)", Radiation Hardening=No, Reach SVHC Compliant=Unknown, RoHS=Yes, RoHS Compliant=Yes, Series=CHipLED, Source=Semiconductor.SchLib, Stock=56745, Test Current=20mA, Viewing Angle=130°, Wavelength=631nm, Width=0.8mm
R1 R3 R15: "Resistor", Manufacturer_Name=Panasonic, Mouser Part Number=667-ERJ-3GEYJ271V, Arrow Part Number=ERJ-3GEYJ271V, Arrow Price/Stock=https://www.arrow.com/en/products/erj-3geyj271v/panasonic?region=nac, Datasheet Link=http://docs-europe.electrocomponents.com/webdocs/13ba/0900766b813ba21b.pdf, Height=0.55mm, Manufacturer_Part_Number=ERJ-3GEYJ271V, Mouser Price/Stock=https://www.mouser.co.uk/ProductDetail/Panasonic/ERJ-3GEYJ271V?qs=gUVpg3Fu0g%2FL9W%252BXBtc%252BCA%3D%3D
R2: library part CMP-009-00017-5, "Chip Resistor, 10 KOhm, +/- 1%, 01 W, -55 to 155 degC, 0603 (1608 Metric)", Case/Package=0603, Max Operating Temperature=155°C, Min Operating Temperature=-55°C, Power=100mW, Tolerance=1%, Voltage Rating=50V, Mounting Technology=SM, Pins=2, RoHS Compliant=True
R4 R6 R7 R8 R12 R13: library part CMP-009-00179-1, "No Description Available", Manufacturer_Name=Yageo, Copyright="Copyright (C) 2025 Ultra Librarian. All rights reserved.", Design Item ID=AC0402JR-070RL, Manufacturer_Part_Number=AC0402JR-070RL, Source=AC0402JR-070RL.SchLib
R5 R11 R14: library part CMP-009-00177-1, "Res Thick Film 0603 10K Ohm 5% 1/10W ±200ppm/°C Molded SMD Paper T/R", Case/Package=0603, Max Operating Temperature=155°C, Min Operating Temperature=-55°C, Tolerance=5%, Voltage Rating=75V, Mounting Technology="Surface Mount"
R9 R10: library part CMP-009-00178-1, "Res Thick Film 0603 27 Ohm 5% 1/10W +/-200ppm/ßC Molded SMD Punched Carrier T/R", Case/Package=0603, Max Operating Temperature=155°C, Min Operating Temperature=-55°C, Tolerance=5%, Voltage Rating=75V, Mounting Technology="Surface Mount"
SD1 SD2 SD4 SD5: library part HEXABIT_UART_PORT_D
SU1 SU2 SU4 SU5: library part HEXABIT_UART_PORT_U
U1: library part CMP-031-00010-1, "MCU 32-bit ARM Cortex M0+ RISC 512KB Flash 1.8V/2.5V/3.3V 48-Pin UFQFPN EP Tray", Manufacturer=STMicroelectronics, Category=Microcontrollers, Component Type=Standard, Design Item ID=STM32G0B1CEU6, Library=Hexabitz, Manufacturer Part Number=STM32G0B1CEU6, Pins=49, Pricing="1=4.78, 10=3.635, 25=3.3488, 100=3.0347, 260=2.87923, 520=2.7899, 1040=2.71638, 2600=2.63877 (USD)", RoHS=Yes, Source=ICs.SchLib, Stock=4305
VDD2 VDD3 VDD4 VDD5: library part HEXABIT_POWER_PORT_U
X1: library part CMP-031-000013-1, "Ceramic Resonator 8MHz ±0.5% (Tol) ±0.2% (Stability) 10pF 40Ohm 3-Pin CSMD T/R", Case Code (Imperial)=1206, Case Code (Metric)=3216, Frequency=8MHz, Frequency Stability=0.2%, Frequency Tolerance=0.5%, Load Capacitance=10pF, Manufacturer=Murata, Max Operating Temperature=125°C, Min Operating Temperature=-40°C, Package Quantity=1, Case/Package=1206, Category=Capacitors, Component Type=Standard, Contact Plating=Gold, Design Item ID=CSTCE8M00G52Z-R0, Height=0.031inch, Impedance=40R, Length=3.2mm, Library=Hexabitz, Manufacturer Part Number=CSTCE8M00G52Z-R0, Mounting Technology="Surface Mount", Packaging="Tape and Reel", Pin Count=3, Pins=3, RoHS Compliant=Yes, Self Resonant Frequency=8MHz, Series=CERALOCK®, Source=Passive.SchLib, Termination=SMD/SMT, Tolerance=0.5%, Width=1.3mm

## Via types
v1: diameter 50, hole 28, Top Layer to Bottom Layer, 10 vias

## Nets (pads, with @x,y where several pads share a name; then routed paths per layer and width w, separated by ;. In a path a pad name is that pad's centre, name@x,y a point inside that pad or via, vN(x,y) a via of type N, cw(c..) or ccw(c..) an arc to the next point about the centre after c; other vN are vias at no path point)
CLK_BOOT: J2.1 J2.2 R2.1 U1.36 | length 232.2
  Top Layer w10: J2.1 J2.2
  Bottom Layer w10: J2.2 -430.47,29.53 R2.1
DATA: J2.3 U1.35
GND: C5.2 C6.1 C7.2 C8.2 C9.2 C10.2 C11.2 C12.2 CR1.2 CR2.2 CR3.2 CR4.2 CR5.2 CR6.2 GND2.Pwr_D GND3.Pwr_D GND4.Pwr_D GND5.Pwr_D IC1.1 IC1.27 IC1.40 IC1.41 IC1.42 IC1.43 IC1.44 IC1.45 IC1.46 IC1.47 IC1.48 IC1.49 J3.4 J3.5 J3.6 LED2.1 R1.2 R2.2 R4.1 R14.1 R15.1 U1.1 U1.2 U1.3 U1.23 U1.24 U1.25 U1.30 U1.49 X1.P$2 | length 7228.1
  Top Layer w10: CR5.2 v1(-560,0) ; IC1.1 -255.29,500 -118.66,363.37 IC1.43 ; C11.2 -260,-300 -280,-320 -280,-340 -280,-343 -245.09,-343 -224,-364.1 C12.2 -195,-364.1 -184,-375.1 -184,-444 -205,-465 -226.61,-465 J3.5@-226.61,-475 ; J3.5 J3.5@-226.61,-475 ; IC1.45 IC1.44 ; IC1.46 IC1.41 ; IC1.47 IC1.48 ; IC1.49 IC1.42 IC1.43 ; J3.4 135.59,-357.68 122.91,-345 R1.2 122.91,-309 -30,-309 -30,-320 R14.1 -80,-338 -98,-356 -92,-362 -101,-362 -101,-475 J3.5@-226.61,-475 ; J3.6 222.21,-427.8 255,-395 CR2.2@280,-395 ; CR1.2@272,-260 272,-384 CR2.2@280,-384 ; CR2.2 CR2.2@280,-395 ; IC1.40 310.47,500 LED2.1 ; CR3.2@400,8 435,8 460,-17 CR4.2 ; IC1.44 -118.66,223 IC1.43 ; IC1.44 IC1.41 ; IC1.41 IC1.48 ; IC1.48 96.54,196.06 170.47,270 LED2.1 ; LED2.1 295,235.47 295,-140 305,-150 IC1.27 387,-150 407,-170 407,-309 384,-332 384,-384 CR2.2@280,-384 ; CR2.2@280,-395 CR2.2@280,-384
  Bottom Layer w7: C7.2 -239.05,-400 -223.94,-415.12 C6.1 ; C8.2 -153.46,497.09 -123.94,467.56 C9.2
  Bottom Layer w10: GND5.Pwr_D -601.39,-49 -511,-49 ; v1(-560,0) -511,-49 ; R2.2 R2.2@-344,-29.53 ; GND4.Pwr_D -284.17,-522.36 J3.5 ; C8.2 -316.91,497.09 -342.55,471.45 -342.55,150 -301.1,108.54 ; R15.1 -301.1,108.54 ; C6.1 -220,-466.39 -226.61,-473 J3.5 ; U1.24 -128.27,-510 -140.62,-522.36 -185,-522.36 ; C9.2 -71.66,467.56 -60,455.9 -60,334.47 -122.45,272.01 ; U1.2 U1.1 ; C5.2 9.56,140 -122.45,272.01 ; GND3.Pwr_D 263.23,-563.39 J3.6 222.21,-562 -173,-562 -173,-534.36 -185,-522.36 ; -511,-49 -485,-49 ; -485,-49 -509,-25 -509,30 -489,50 -403.55,50 -345,108.54 -301.1,108.54 ; -485,-49 -404.48,-49 ; -404.48,-49 -385,-29.53 R2.2@-344,-29.53 ; -404.48,-49 -344,-49 R2.2@-344,-29.53 ; J3.5 -185,-522.36 ; -122.45,272.01 -126.91,267.56 C10.2 -122.45,272.01
NetC10_1: C10.1 IC1.3 R5.2 U1.38 | length 670.6
  Top Layer w10: IC1.3 -304,400 -241.41,337.41 -241.41,179.4 v1(-139,77)
  Bottom Layer w10: R5.2 -232,215.2 -229.24,212.44 C10.1 -178.74,212.44 -178.74,116.73 v1(-139,77)
NetC11_1: C11.1 CR5.1 J3.3 R10.1 | length 1265
  Top Layer w10: CR5.1 CR5.1@-560,-154 ; v1(-433,-285) -560,-158 CR5.1@-560,-154 ; C11.1 -328.06,-280 -349,-259.06 R10.1 -419,-259.06 -524.05,-154 CR5.1@-560,-154 ; v1(-147,-532) -116.64,-562.36 11.75,-562.36 37.17,-536.95 J3.3
  Bottom Layer w10: v1(-433,-285) -433,-347 -334,-446 -195,-446 -182,-459 -182,-497 v1(-147,-532)
NetC12_1: C12.1 CR6.1 J3.2 R9.1 | length 484.3
  Top Layer w10: R9.1 -368.28,-380 -368.28,-404.72 -345,-428 -280,-428 -254,-428 -246,-420 C12.1 -220,-448 -182,-448 -182,-478 -55,-478 -41.57,-464.58 J3.2
NetCR1_1: CR1.1 IC1.35
NetCR2_1: CR2.1 IC1.34 R6.2
NetCR3_1: CR3.1 IC1.33 R7.2
NetCR4_1: CR4.1 IC1.32 R8.2 | length 522.7
  Bottom Layer w7: R8.2 -4.5,-67 -4.5,-65.91 122.9,61.5 138.95,61.5 138.95,46.5 215.5,46.5 215.5,47.21 215.95,47.21 215.95,80 223.5,80 223.5,102.45 300.5,102.45 300.5,80 348.98,80
NetIC1_9: IC1.9 U1.37
NetIC1_13: IC1.13 R9.2
NetIC1_14: IC1.14 R10.2 | length 54.6
  Top Layer w10: R10.2 -360,-181 -348.98,-169.98 IC1.14
NetIC1_15: IC1.15 R11.2 | length 205.6
  Top Layer w10: IC1.15 -279.49,-230 -265.49,-244 -165,-244 -154,-255 -154,-280 R11.2
NetIC1_18: IC1.18 R14.2 | length 105.2
  Top Layer w10: IC1.18 -129.49,-227 -103,-253.49 -80,-253.49 R14.2
NetIC1_25: IC1.25 LED3.2
NetIC1_36: IC1.36 R13.1
NetIC1_37: IC1.37 R12.1 | length 729
  Top Layer w10: IC1.37 357.55,350 398.34,390.79
  Bottom Layer w10: R12.1 100,-61 214.45,53.45 214.45,103.95 269.02,103.95 315.07,150 315.07,350 355.87,390.79 398.34,390.79
NetJ4_1: J4.1
NetJ4_2: J4.2
NetJ4_3: J4.3
NetJ4_4: J4.4
NetJ5_1: J5.1
NetJ5_2: J5.2
NetLED1_1: LED1.1 R1.1 | length 387.7
  Top Layer w10: LED1.1 96,-376 96,-475 178,-475 180,-473 R1.1
NetLED1_2: LED1.2 U1.19
NetLED2_2: LED2.2 R3.2
NetLED3_1: LED3.1 R15.2
NetR3_1: R3.1 U1.26
NetR6_1: R6.1 U1.42 | length 81.8
  Bottom Layer w7: R6.1 -60,-136.5 -47.32,-149.17 -42.8,-149.17 -30.12,-161.85 -30.12,-183.89 U1.42
NetR7_1: R7.1 U1.44 | length 71
  Bottom Layer w7: U1.44 9.53,-149.46 12.5,-146.48 12.5,-125 R7.1
NetR8_1: R8.1 U1.43 | length 71
  Bottom Layer w7: R8.1 -20,-142.91 -9.88,-153.03 -9.88,-183.89 U1.43
NetU1_8: U1.8 X1.P$1 | length 120.9
  Bottom Layer w7: 115.83,-329.53 116.11,-329.25 138.15,-329.25 155.13,-312.27 155.13,-309.73 172.1,-292.76 X1.P$1
NetU1_9: U1.9 X1.P$3 | length 120.2
  Bottom Layer w7: 115.83,-349.21 116.11,-348.93 152.17,-348.93 190.47,-387.24 X1.P$3
NRST: C5.1 J1.1 U1.10 | length 746.1
  Bottom Layer w10: C5.1 247.56,363.56 295,411 419,411 420,410 J1.1@420,80
UART1_RX: SD4.UART_D U1.32
UART1_TX: SU4.UART_U U1.29
UART2_RX: SD2.UART_D U1.14
UART2_TX: SU2.UART_U U1.13
UART3_RX: R12.2 U1.48 | length 71.5
  Bottom Layer w7: U1.48 88.27,-173.35 100,-161.61 R12.2
UART3_TX: R13.2 U1.47 | length 70.2
  Bottom Layer w7: R13.2 60,-143.82 68.3,-152.12 68.3,-183.89 U1.47
UART4_RX: SD1.UART_D U1.12
UART4_TX: SU1.UART_U U1.11
UART5_RX: SD5.UART_D U1.40
UART5_TX: SU5.UART_U U1.41
UART6_RX: U1.16
UART6_TX: U1.15
VDD: C6.2 C7.1 C8.1 C9.1 FB1.1 IC1.2 J3.1 R5.1 R11.1 U1.31 VDD2.Pwr_U VDD3.Pwr_U VDD4.Pwr_U VDD5.Pwr_U | length 3635.9
  Top Layer w10: VDD5.Pwr_U -580,70.39 FB1.1 -580,131 -394,317 -394,440 -384,450 IC1.2 -303,450 v1(-170,317) ; v1(-356,-325) -391,-325 -416,-350 -416,-415 -325.2,-505.8 VDD4.Pwr_U ; R11.1 -189.61,-320 -140,-369.61 J3.1 ; v1(-75,51) v1(255,51) ; v1(496,11) 501,6 632,6 632,0 VDD2.Pwr_U
  Bottom Layer w7: C8.1 -210.47,412.44 -124,412.44 C9.1
  Bottom Layer w10: v1(-356,-325) C7.1@-300,-325 ; C8.1 -240,333 -260,313 R5.1 -285,264.8 -295,254.8 -295,190 -241.35,136.34 -198.74,136.34 -198.74,-27.74 -300,-129 -300,-174 ; C6.2 -224,-360 -247,-337 -300,-337 C7.1 C7.1@-300,-325 ; v1(-170,317) -124,363 C9.1@-124,412.44 ; v1(-75,51) -300,-174 ; v1(255,51) 295,11 v1(496,11) ; C7.1@-300,-325 -300,-174
VDDA: C1.2 C2.1 C3.2 C4.1 FB1.2 U1.4 U1.5 U1.6 | length 345.8
  Bottom Layer w10: C1.2 172.44,-214 139,-180.56 139,-106 236.87,-106 250.87,-120 ; C2.1 250.87,-120 ; C4.1 251.5,-90 250.87,-90.63 250.87,-120
VSSA: C1.1 C2.2 C3.1 C4.2 R4.2 U1.7 | length 885.2
  Top Layer w10: C3.1 215.12,-357.83 296.95,-357.83 322.17,-383.05 357.83,-383.05 439,-301.89 v1(439,-211)
  Bottom Layer w10: C2.2 C2.2@188.5,-140 ; C4.2 C2.2@188.5,-140 ; C1.1 227.56,-226.06 227.56,-219 ; v1(439,-211) 235.56,-211 227.56,-219 ; C2.2@188.5,-140 204,-140 204,-163 227.56,-186.56 227.56,-219
pads on no net: IC1.4 IC1.5 IC1.6 IC1.7 IC1.8 IC1.10 IC1.11 IC1.12 IC1.16 IC1.17 IC1.19 IC1.20 IC1.21 IC1.22 IC1.23 IC1.24 IC1.26 IC1.28 IC1.29 IC1.30 IC1.31 IC1.38 IC1.39 J3.MH1 J3.MH2 U1.17 U1.18 U1.20 U1.21 U1.22 U1.27 U1.28 U1.33 U1.34 U1.39 U1.45 U1.46

## Keep-outs
Keep-Out Layer:
  the board outline again, w3.94

## Silkscreen, mask and mechanical layers (free items; w line width, h text height)
Top Overlay:
  drawing of 1337 lines, arcs and shapes, not listed
  text "3V3" at -565.01,-37 h32 r90
  text "3V3" at 614.99,-37 h32 r90
  text "3V3" at -337,-494.99 h32
  text "3V3" at 263,-494.99 h32
Bottom Overlay:
  text "H21R4" at 310,490 h70
  text "P1" at 410,234.02 h76
  text "GND" at -565.01,117 h32 r90
  text "GND" at 594.99,37 h32 r90
  text "P4" at -310,-225.98 h76
  text "GND" at 263,-465.01 h32 r180
Top Solder:
  drawing of 20 lines, arcs and shapes, not listed
Dimensions:
  the board outline again, w3.94

## Text inside footprints (layer, text, board x,y; h text height)
CR1: Top Overlay "*" at 398.5,-235 h50 r180; Mechanical 13 "RefDes2" at 391.5,-235 h50 r180; Mechanical 13 "*" at 344,-235 h50 r180
CR2: Top Overlay "*" at 305,-534.5 h50 r90; Mechanical 13 "RefDes2" at 305,-527.5 h50 r90; Mechanical 13 "*" at 305,-480 h50 r90
CR3: Top Overlay "*" at 425,-114.5 h50 r90; Mechanical 13 "RefDes2" at 425,-107.5 h50 r90; Mechanical 13 "*" at 425,-60 h50 r90
CR4: Top Overlay "*" at 485,-190.5 h50 r90; Mechanical 13 "RefDes2" at 485,-183.5 h50 r90; Mechanical 13 "*" at 485,-136 h50 r90
CR5: Top Overlay "*" at -535,-190.5 h50 r90; Mechanical 13 "RefDes2" at -535,-183.5 h50 r90; Mechanical 13 "*" at -535,-136 h50 r90
CR6: Top Overlay "*" at -255,-474.5 h50 r90; Mechanical 13 "RefDes2" at -255,-467.5 h50 r90; Mechanical 13 "*" at -255,-420 h50 r90
J3: Mechanical 1 "PCB EDGE" at 47.8,-622.36 h19.68